# Altium PCB RFID_USB_Reader.PcbDoc
Units mil, origin at the board's own origin, x right, y up, seen from the top; angles counter-clockwise.
Board outline 1550 x 1200 mil, 2 copper layers (Top, Bottom), stack 61.811 mil thick; 25 components, 17 nets, 92 pads, 9 vias.
Unrouted connection lines stored in the file: 14.
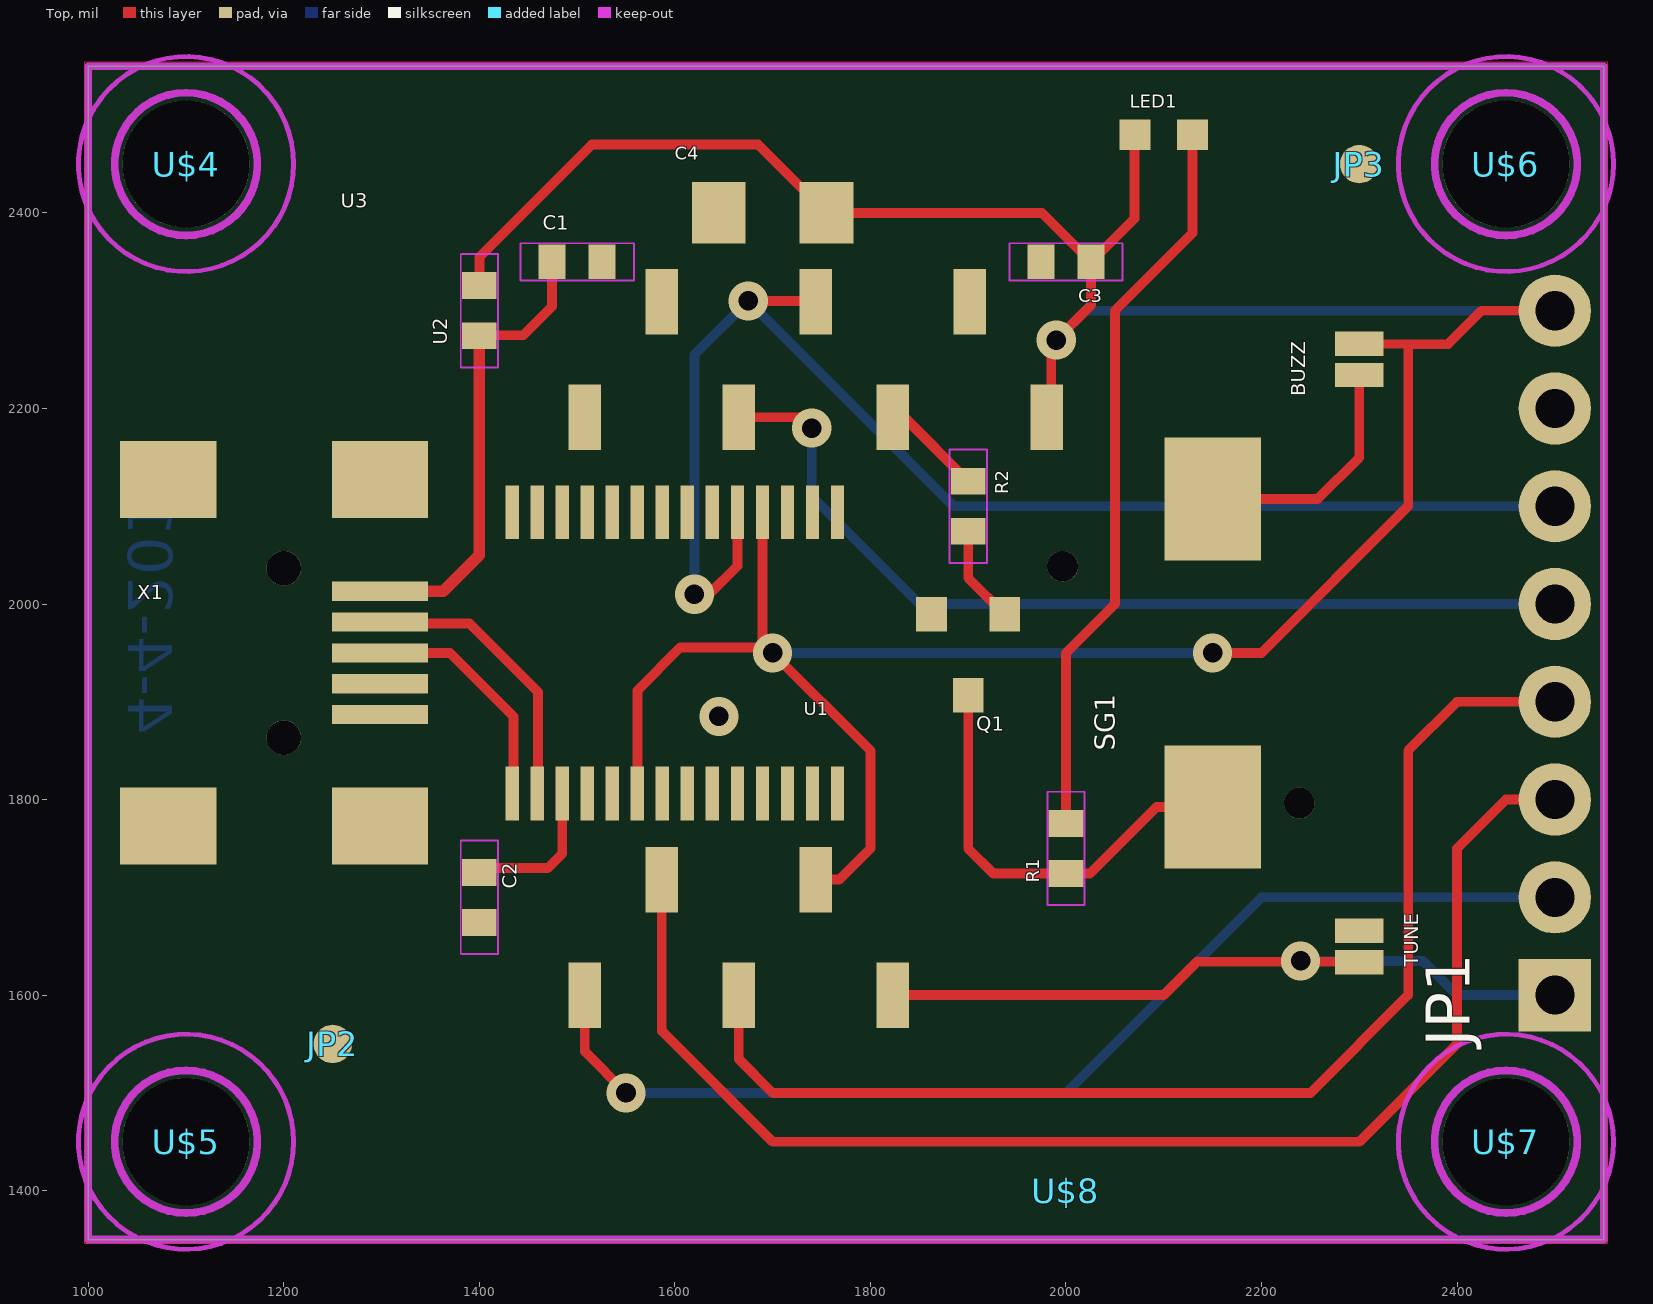
[diagram p0: Top view]
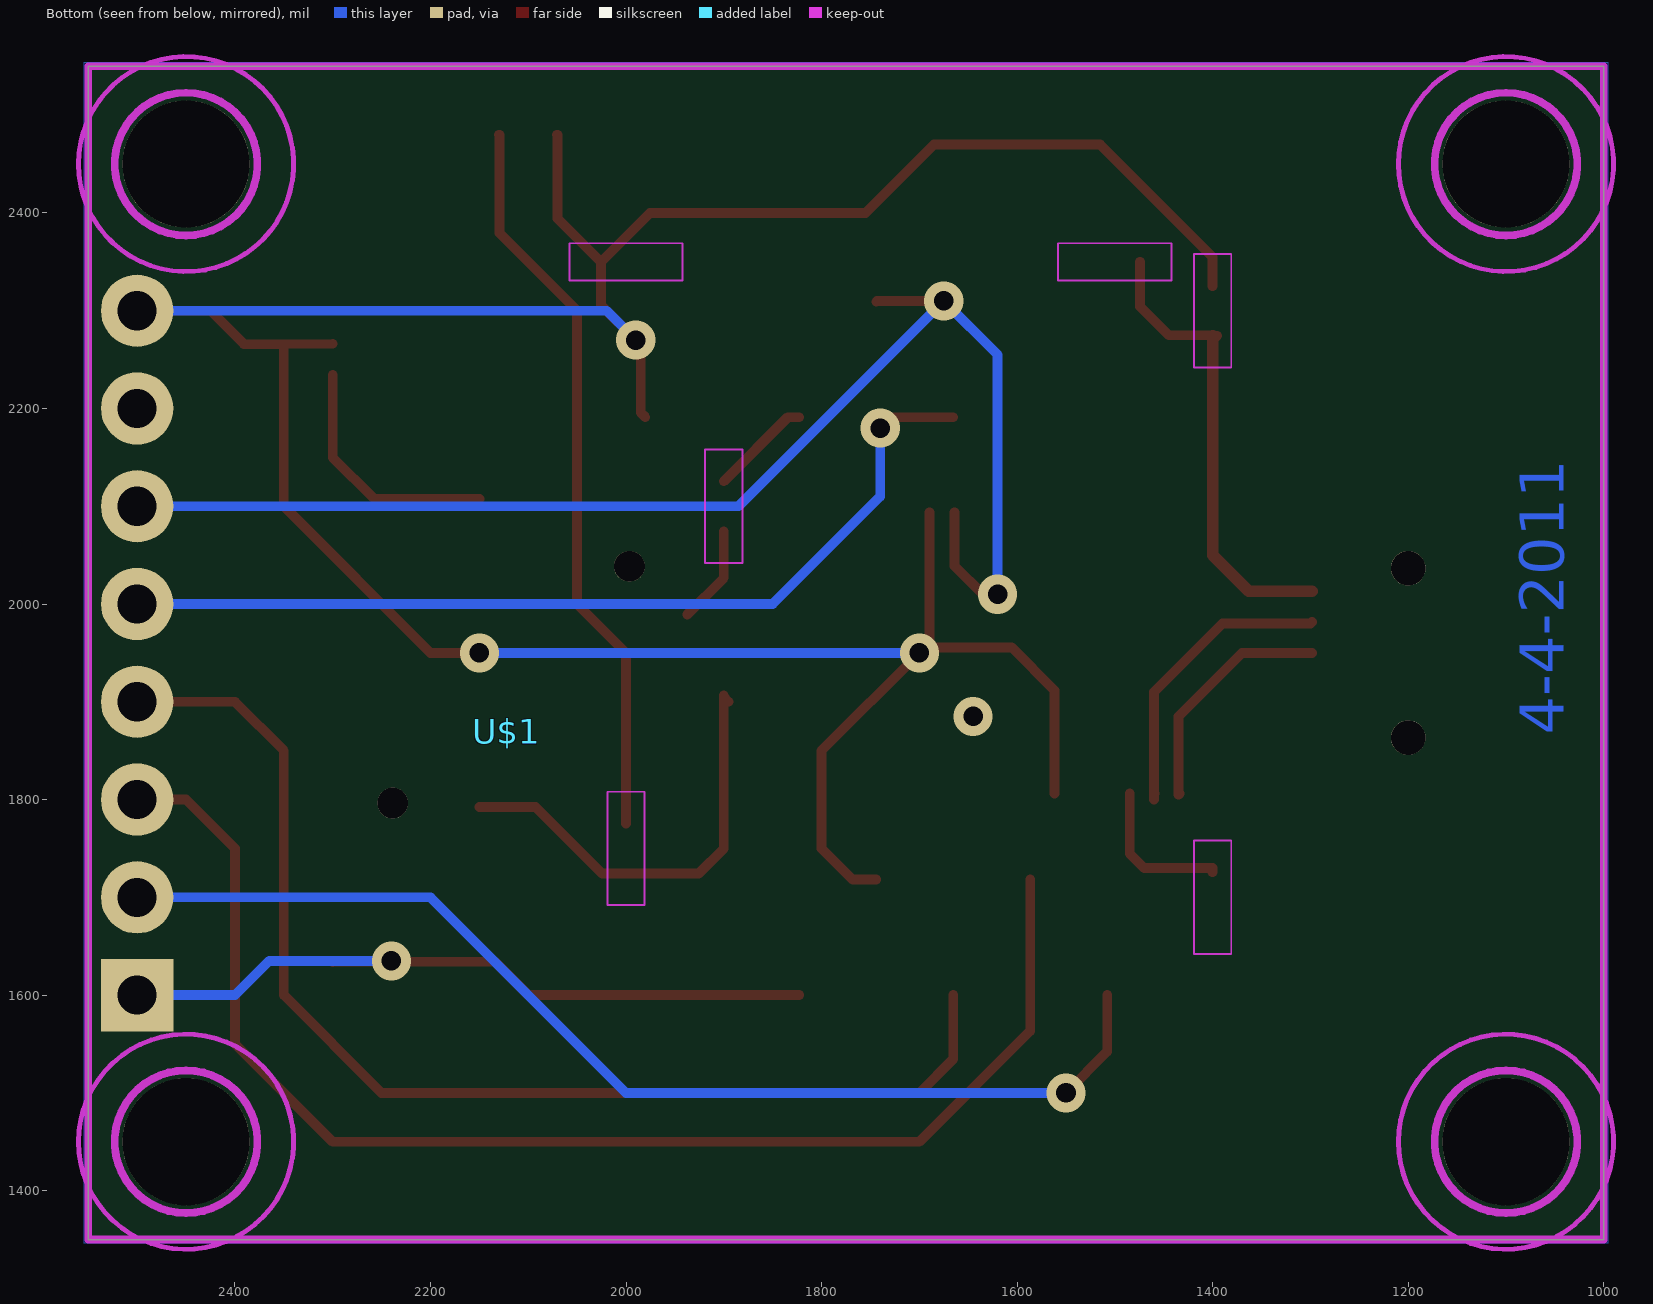
[diagram p1: Bottom view, seen from below]

## Layer stack, top to bottom
Top Solder: solder mask 0.4, Solder Resist, Dk 3.5
Top: signal copper 1.378
Dielectric 1: core 59.0551, FR-4, Dk 4.8
Bottom: signal copper 1.378
Bottom Solder: solder mask 0.4, Solder Resist, Dk 3.5

## Board outline
1000,1350 2550,1350 2550,2550 1000,2550

## Design rules (kind name [scope] priority, off if disabled: settings)
Clearance [All] p1: gap=8 ignorepadtopadclearanceinfootprint=FALSE except(0: SMDPad-SMDPad SMDPad-THPad SMDPad-Via)
Clearance "Clearance (Same Net)" [All] p2: gap=0 ignorepadtopadclearanceinfootprint=FALSE except(8: SMDPad-SMDPad SMDPad-THPad SMDPad-Via)
HoleSize HoleSize_1 [All] p1: absolutevalues=TRUE maxlimit=100000 minlimit=20 maxpercent=80.000 minpercent=20.000
HoleSize [All] p2: absolutevalues=TRUE maxlimit=100 minlimit=1 maxpercent=80.000 minpercent=20.000
HoleToHoleClearance mdViaViaSameLayer [All] p1: gap=8 allowstackedmicrovias=TRUE
HoleToHoleClearance [All] p2: gap=10 allowstackedmicrovias=TRUE
PasteMaskExpansion mlMinCreamFrame [All] p1: expansion=0
PasteMaskExpansion [All] p2: expansion=0
PolygonConnect ThermalVias [IsVia] p1: connectstyle=Direct reliefconductorwidth=10 reliefentries=4 polygonreliefangle="90 Angle" airgapwidth=10
PolygonConnect [All] p2: connectstyle=Relief reliefconductorwidth=10 reliefentries=4 polygonreliefangle="90 Angle" airgapwidth=10
RoutingVias [All] p1: holewidth=28 width=50 viastyle="Through Hole" minholewidth=28 minwidth=50 maxholewidth=28 maxwidth=50
SilkToSilkClearance [All] p1 off: silktosilkclearance=10
SilkToSolderMaskClearance [IsPad] p1 off: minsilkscreentomaskgap=10 clearancetoexposedcopper=TRUE
SolderMaskExpansion mlMinStopFrame [All] p1: expansion=4
SolderMaskExpansion [All] p2: expansion=4
Width Width_1 [All] p1: maxlimit=100000 minlimit=8 preferedwidth=10
Width [All] p2: maxlimit=10 minlimit=10 preferedwidth=10
25 further rules are at their usual default settings.

## Components (designator, comment, footprint, x,y, rotation, side; value= is the part's Value field where it differs from the comment)
BUZZ "buzz" SJ_2S-NOTRACE 2300,2250 r90 top
C1 "10nF" 0402-CAP 1500,2350 r0 top
C2 "0.1uF" 0402-CAP 1400,1700 r270 top
C3 "0.1uF" 0402-CAP 2000,2350 r180 top
C4 "10uF" EIA3216 1700,2400 r0 top
JP1 "" 1X08 2500,1600 r90 top
JP2 "" FIDUCIAL-1X2 1250,1550 r0 top
JP3 "" FIDUCIAL-1X2 2300,2450 r0 top
LED1 "GRN" LED-0603 2100,2480 r270 top
Q1 "MMBT2222" SOT23-3 1900,1950 r180 top
R1 "330" 0402-RES 2000,1750 r90 top
R2 "180" 0402-RES 1900,2100 r270 top
SG1 "BUZZERSMD2" BUZZER-CCV 2150,1950 r90 top
TUNE "SOLDERJUMPERNC2" SJ_2S-NOTRACE 2300,1650 r270 top
U1 "FT232RL-BASICSSOP" SSOP28DB 1600,1950 r180 top
U2 "33nH" C0402 1400,2300 r90 top
U3 "ID-12/20SMD" ID-12_SMD 1183.11,1450 r0 top
U$1 "" SFE-NEW-WEBLOGO 2121.89,1870 r180 bottom
U$2 "" CREATIVE_COMMONS 1800,1000 r0 top
U$4 "" STAND-OFF 1100,2450 r0 top
U$5 "" STAND-OFF 1100,1450 r0 top
U$6 "" STAND-OFF 2450,2450 r0 top
U$7 "" STAND-OFF 2450,1450 r0 top
U$8 "" SFE-LOGO-FLAME 2000,1400 r0 top
X1 "USBSMD" USB-MINIB 1200,1950 r0 top

## Footprints (in the part's own frame and the unit in brackets; to place one, negate y for a bottom-side part, rotate by r counter-clockwise, add the part's x,y. Pads: shape width x height; smd on the part's side, far side on the other; paste and mask are expansions set on the pad)
1X08 [mil] "1X08"
  rect 74x74 hole 40: 1(0,0)
  round 74 hole 40: 2(100,0) 3(200,0) 4(300,0) 5(400,0) 6(500,0) 7(600,0) 8(700,0)
0402-CAP [mm] "0402-CAP"
  rect 0.7x0.9 smd: 1(-0.65,0) 2(0.65,0)
  Keep-Out Layer lines w0.051: -1.473,-0.483 1.473,-0.483 1.473,0.483 -1.473,0.483 -1.473,-0.483
0402-RES [mm] "0402-RES"
  rect 0.7x0.9 smd: 1(-0.65,0) 2(0.65,0)
  Keep-Out Layer lines w0.051: -1.473,0.483 1.473,0.483 1.473,-0.483 -1.473,-0.483 -1.473,0.483
BUZZER-CCV [mil] "BUZZER-CCV"
  round 31.5 hole 31.5: 1(-153.54,-88.58) 1(88.58,153.54)
  rect 125.98x98.43 smd: +(157.48,0) -(-157.48,0)
C0402 [mm] "C0402"
  rect 0.7x0.9 smd: 1(-0.65,0) 2(0.65,0)
  Keep-Out Layer lines w0.051: -1.473,0.483 1.473,0.483 1.473,-0.483 -1.473,-0.483 -1.473,0.483
CREATIVE_COMMONS [mil] "CREATIVE_COMMONS"
EIA3216 [mil] "EIA3216"
  rect 55.12x62.99 smd: A(55.12,0) C(-55.12,0)
FIDUCIAL-1X2 [mm] "FIDUCIAL-1X2"
  rrect100% 1x1 smd paste-0.5: 1(0,0)
ID-12_SMD [mil] "ID-12_SMD"
  rect 33.46x66.93 smd: 1(639.7,150.02) 2(560.96,268.13) 3(482.22,150.02) 4(403.48,268.13) 5(324.74,150.02) 6(324.74,741.02) 7(403.48,859.13) 8(482.22,741.02) 9(560.96,859.13) 10(639.7,741.02) 11(797.18,741.02) NC(718.44,859.13)
LED-0603 [mil] "LED-0603"
  rect 31.5x31.5 smd: A(0,-29.53) C(0,29.53)
SFE-LOGO-FLAME [mil] "SFE-LOGO-FLAME"
SFE-NEW-WEBLOGO [mil] "SFE-NEW-WEBLOGO"
SJ_2S-NOTRACE [mil] "SJ_2S-NOTRACE"
  rect 25x50 smd paste-25: 1(-15.78,0) 2(16.25,0)
SOT23-3 [mil] "SOT23-3"
  rect 31.5x35.43 smd: 1(-37.4,-39.37) 2(37.4,-39.37) 3(0,43.31)
SSOP28DB [mil] "SSOP28DB"
  rect 13.7x55 smd: 1(-166.34,-143.94) 2(-140.75,-143.94) 3(-115.16,-143.94) 4(-89.57,-143.94) 5(-63.98,-143.94) 6(-38.39,-143.94) 7(-12.8,-143.94) 8(12.8,-143.94) 9(38.39,-143.94) 10(63.98,-143.94) 11(89.57,-143.94) 12(115.16,-143.94) 13(140.75,-143.94) 14(166.34,-143.94) 15(166.34,143.94) 16(140.75,143.94) 17(115.16,143.94) 18(89.57,143.94) 19(63.98,143.94) 20(38.39,143.94) 21(12.8,143.94) 22(-12.8,143.94) 23(-38.39,143.94) 24(-63.98,143.94) 25(-89.57,143.94) 26(-115.16,143.94) 27(-140.75,143.94) 28(-166.34,143.94)
STAND-OFF [mil] "STAND-OFF"
  round 130 hole 130: 1(0,0)
  Top keep-out lines w8: 0,-73 ccw(c0,0) 0,73 ccw(c0,0) 0,-73
  Bottom keep-out lines w8: 0,-73 ccw(c0,0) 0,73 ccw(c0,0) 0,-73
  Keep-Out Layer circle w5: c0,0 r110
USB-MINIB [mm] "USB-MINIB"
  round 0.9 hole 0.9: 1(0,-2.2) 1(0,2.2)
  rect 2.5x0.5 smd: D+(2.5,0) D-(2.5,0.8) GND(2.5,-1.6) ID(2.5,-0.8) VBUS(2.5,1.6)
  rect 2.5x2 smd: GND@1(-3,-4.5) GND@2(-3,4.5) GND@3(2.5,4.5) GND@4(2.5,-4.5)

## Part data
BUZZ TUNE: library part SJ_2S-NOTRACE
C1 C2 C3: library part 0402-CAP
C4: library part EIA3216
JP1: library part 1X08
JP2 JP3: library part FIDUCIAL-1X2
LED1: library part LED-0603
Q1: library part SOT23-3
R1 R2: library part 0402-RES
SG1: library part BUZZER-CCV
U1: library part SSOP28DB
U2: library part C0402
U3: library part ID-12_SMD
U$1: library part SFE-NEW-WEBLOGO
U$2: library part CREATIVE_COMMONS
U$4 U$5 U$6 U$7: library part STAND-OFF
U$8: library part SFE-LOGO-FLAME
X1: library part USB-MINIB

## Via types
v1: diameter 40/40 (per signal layer), hole 20, Top to Bottom, 9 vias

## Nets (pads, with @x,y where several pads share a name; then routed paths per layer and width w, separated by ;. In a path a pad name is that pad's centre, name@x,y a point inside that pad or via, vN(x,y) a via of type N, cw(c..) or ccw(c..) an arc to the next point about the centre after c; other vN are vias at no path point)
ANT1: JP1.4 U3.3 | length 1226.5
  Top w10: U3.3 1665.33,1534.67 1700,1500 2250,1500 2350,1600 2350,1850 2400,1900 JP1.4
ANT2: JP1.3 U3.4 | length 1377.2
  Top w10: U3.4 1586.59,1563.41 1700,1450 2300,1450 2400,1550 2400,1750 2450,1800 JP1.3
CP: JP1.2 U3.5 | length 1150.3
  Top w10: U3.5 1507.85,1542.15 v1(1550,1500)
  Bottom w10: v1(1550,1500) 2000,1500 2200,1700 JP1.2
GND: C1.2 C2.2 C3.2 C4.C JP1.7 Q1.2 TUNE.1 U1.7 U1.18 U1.21 U1.25 U1.26 U3.7 X1.GND
  other v1: 1645,1885
GNDT: JP1.1 TUNE.2 U3.1 | length 826.2
  Top w10: U3.1 2100.02,1600.02 2134.25,1634.25 TUNE.2 2240.75,1634.25 v1(2240,1635)
  Bottom w10: v1(2240,1635) 2365,1635 2400,1600 JP1.1
LED: R2.1 U3.10 | length 104.3
  Top w10: U3.10 1834.57,2191.02 R2.1
N$1: Q1.3 R1.1 SG1.- | length 454.3
  Top w10: Q1.3@1895,1900 1900,1905 Q1.3 1900,1750 1925.59,1724.41 R1.1 2024.41,1724.41 2092.52,1792.52 SG1.-
N$2: U1.16 X1.D- | length 302.2
  Top w10: X1.D- 1299.92,1980 1390,1980 1460,1910 U1.16@1460,1805.32 ; U1.16 U1.16@1460,1805.32 ; U1.16@1460,1800 U1.16@1460,1805.32
N$3: C1.1 U2.1 X1.VBUS | length 484.7
  Top w10: U2.1@1395.59,2274.41 1400,2270 U2.1 1400,2275 1445,2275 1474.41,2304.41 C1.1
  Top w12: X1.VBUS 1362.99,2012.99 1400,2050 U2.1
N$4: U1.15 X1.D+ | length 245.6
  Top w10: X1.D+ 1370,1950 1435,1885 1435,1805 1434.72,1805 U1.15 U1.15@1433.66,1806.34
N$5: BUZZ.1 SG1.+ | length 251.8
  Top w10: SG1.+ 2257.48,2107.48 2300,2150 BUZZ.1
N$6: C2.1 U1.17 | length 156.6
  Top w10: C2.1 1400,1730 1470,1730 1484.84,1744.84 U1.17
N$7: LED1.C R1.2 | length 758.5
  Top w10: R1.2 2000,1950 2050,2000 2050,2300 2129.53,2379.53 LED1.C LED1.C@2130,2480
N$8: Q1.1 R2.2 | length 100.5
  Top w10: R2.2 1900,2026.77 Q1.1
TX-O: JP1.6 U1.5 U3.9 | length 1415.1
  Top w10: v1(1620,2010) 1635,2010 1663.98,2038.98 U1.5 ; v1(1675,2310) 1743.2,2310 U3.9
  Bottom w10: v1(1620,2010) 1620,2255 v1(1675,2310) 1885,2100 JP1.6
TX-O-RS232: JP1.5 U3.8 | length 954.8
  Top w10: U3.8 1728.98,2191.02 v1(1740,2180)
  Bottom w10: v1(1740,2180) 1740,2110 1850,2000 JP1.5
VCC: BUZZ.2 C3.1 C4.A JP1.8 LED1.A U1.4 U1.20 U2.2 U3.2 U3.11 | length 3555.7
  Top w10: U2.2@1400,2325 U2.2 1400,2355 1515,2470 1685.12,2470 C4.A 1975.59,2400 C3.1 ; U1.20 1561.61,1911.61 1605.43,1955.43 v1@1689.57,1955.43 ; U3.2 1768.13,1718.13 1800,1750 1800,1850 v1(1700,1950) ; U3.11 1985,2195.72 1985,2265 v1(1990,2270) 2025.59,2305.59 C3.1 ; LED1.A 2070,2480 2070,2394.41 C3.1 ; v1(2150,1950) 2200,1950 2350,2100 2350,2265.75 ; BUZZ.2 2350,2265.75 ; JP1.8 2425,2300 2390.75,2265.75 2350,2265.75 ; v1@1689.57,1955.43 U1.4 1689.57,1960.43 v1(1700,1950) ; v1@1689.57,1955.43 1694.57,1955.43 v1(1700,1950)
  Bottom w10: v1(1700,1950) v1(2150,1950) ; v1(1990,2270) 2020,2300 JP1.8
pads on no net: JP2.1 JP3.1 SG1.1 U1.1 U1.2 U1.3 U1.6 U1.8 U1.9 U1.10 U1.11 U1.12 U1.13 U1.14 U1.19 U1.22 U1.23 U1.24 U1.27 U1.28 U3.6 U3.NC U$4.1 U$5.1 U$6.1 U$7.1 X1.1 X1.GND@1 X1.GND@2 X1.GND@3 X1.GND@4 X1.ID

## Polygon pours and split planes (outlines as drawn)
GND on Bottom "Bottom-GND" (solid, remove dead copper, shelved, pour order 2): 996,2554 996,1346 2554,1346 2554,2554
GND on Top "Top-GND" (solid, remove dead copper, shelved, pour order 0): 996,2554 996,1346 2554,1346 2554,2554

## Keep-outs
Keep-Out Layer:
  the board outline again, w8

## Other copper
Bottom:
  text "4-4-2011" at 1026.04,1866.32 h77.5 r270

## Silkscreen, mask and mechanical layers (free items; w line width, h text height)
Dimension:
  the board outline again, w8
Top Assembly:
  text "Read" at 1855,2460 h77.5
  text "Buzz" at 2235,2310 h77.5
  text "Tune" at 2235,1715 h77.5
  text "RFID USB" at 1295,1400 h124
Bottom Assembly:
  text "VCC" at 2435,2270 h93
  text "GND" at 2435,2170 h93
  text "TX" at 2435,2070 h93
  text "TXR" at 2435,1970 h93
  text "AN1" at 2435,1870 h93
  text "AN2" at 2435,1770 h93
  text "CP" at 2435,1670 h93
  text "GND" at 2435,1570 h93
Reference:
  rectangle: 2175,1572.5 2225,1597.5
  rectangle: 2175,1537.5 2225,1562.5
  lines w10: 2200,1650 2200,1585 2485,1585 2500,1600
  text "before lbr update, the jumper center point was a little different on v14, reference drawing shows exactly where it is on v14 - plewis" at 2650,1600 h10.2

## Text inside footprints (layer, text, board x,y; h text height)
U$2: Assembly Text Top "Released under the Creative Commons Attribution Share-Alike 3.0 License" at 1000,1200 h108.5; Assembly Text Top "http://creativecommons.org/licenses/by-sa/3.0" at 1800,1100 h108.5; Assembly Text Top "Designed by:" at 2250,1000 h108.5